# Altium PCB SixAx.PcbDoc
Units mm, origin at the board's own origin, x right, y up, seen from the top; angles counter-clockwise.
Board outline 30 x 35 mm, 4 copper layers (Component Side, GND, +3.3, Solder Side), stack 0.844 mm thick; 106 components, 61 nets, 323 pads, 139 vias.
Unrouted connection lines stored in the file: 6.
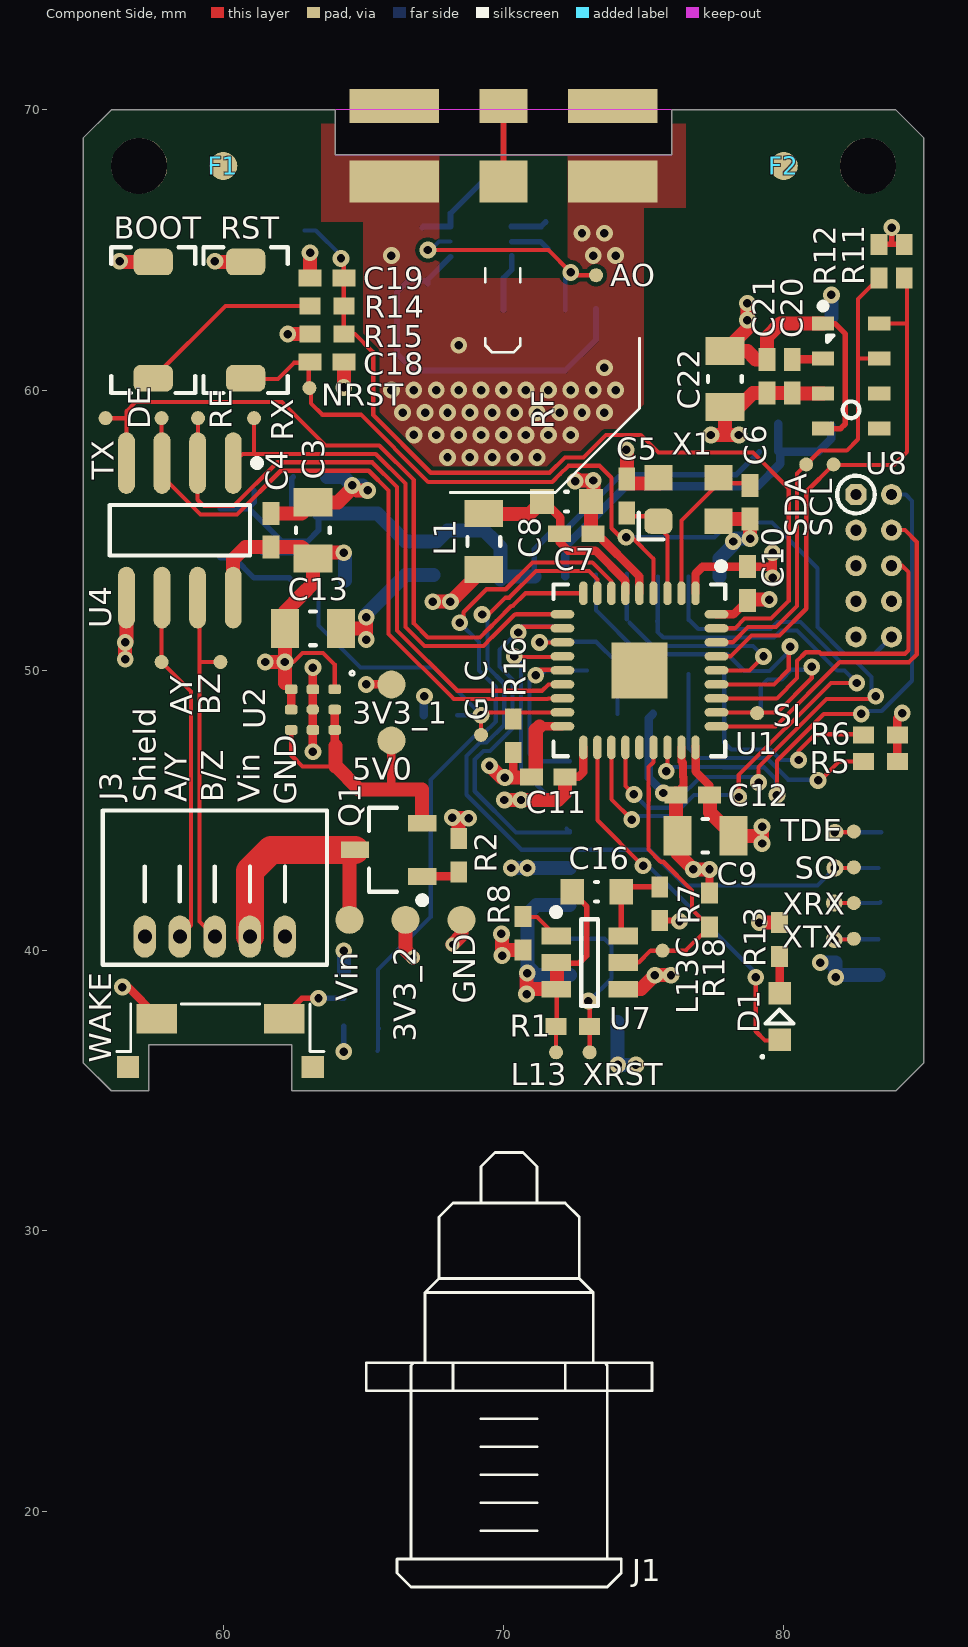
[diagram p0: Component Side view]
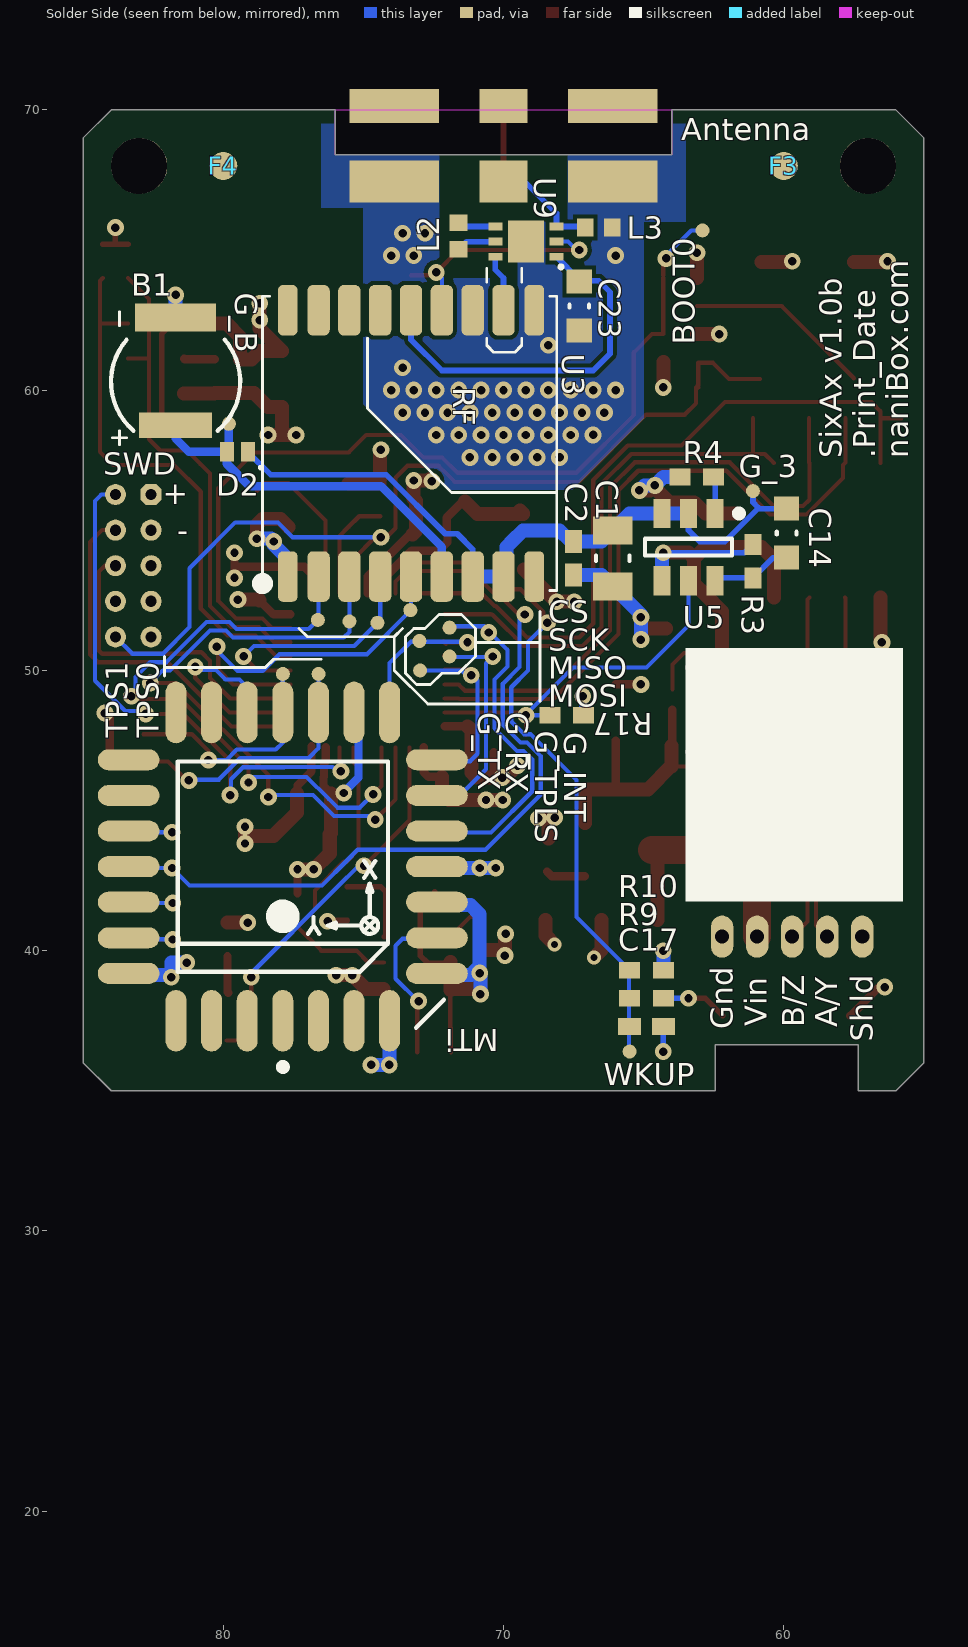
[diagram p1: Solder Side view, seen from below]
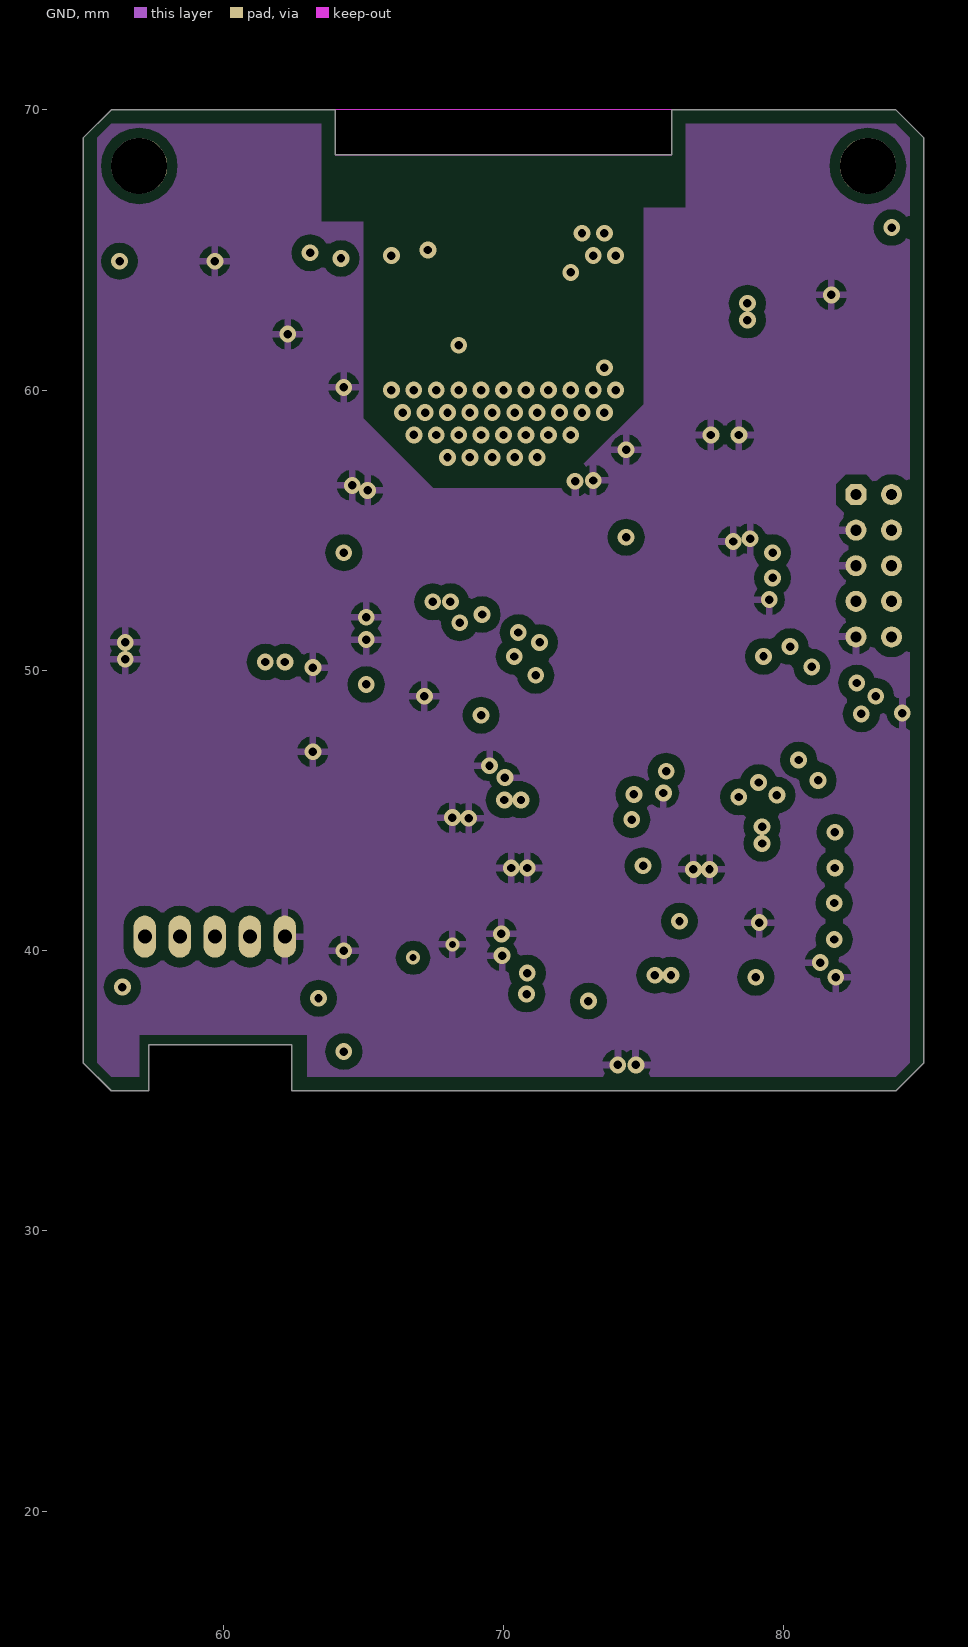
[diagram p2: GND]
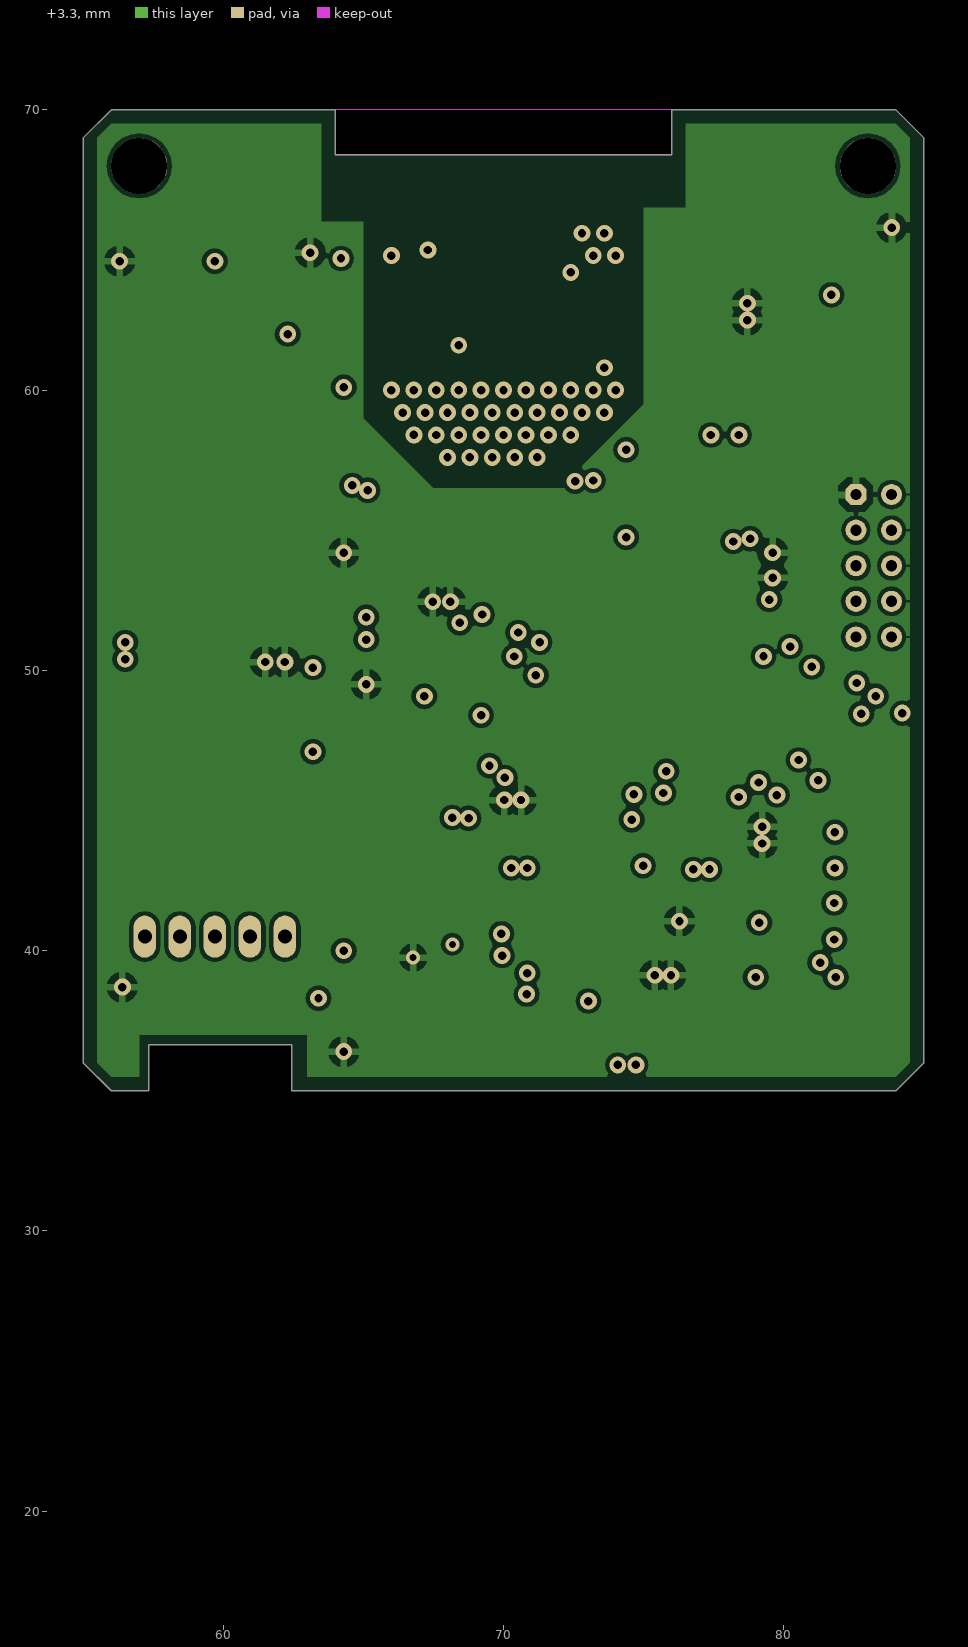
[diagram p3: +3.3]

## Layer stack, top to bottom
Top Solder: solder mask 0.0102, Solder Resist, Dk 3.5
Component Side: signal copper 0.0356
Dielectric 1: core 0.32, FR-4, Dk 4.8
GND: signal copper 0.036
Dielectric 3: prepreg 0.127, FR-4, Dk 4.2
+3.3: signal copper 0.036
Dielectric 4: core 0.254, FR-4, Dk 4.2
Solder Side: signal copper 0.0356
Bottom Solder: solder mask 0.0102, Solder Resist, Dk 3.5

## Board outline
57.35,35 56,35 55,36 55,69 56,70 64,70 64,68.4 76,68.4 76,70 84,70 85,69 85,36 84,35 62.45,35 62.45,36.65 57.35,36.65 57.35,35

## Design rules (kind name [scope] priority, off if disabled: settings)
Clearance Clearance_2 [InNamedPolygon('GND_L02_P006')] p1: gap=0.35 ignorepadtopadclearanceinfootprint=FALSE except(0: Arc-Hole Track-Hole SMDPad-Hole THPad-Hole Via-Hole Fill-Hole Poly-Hole Region-Hole Text-Hole)
Clearance Clearance_1 [InNamedPolygon('+3.3_L03_P010')] p2: gap=0.35 ignorepadtopadclearanceinfootprint=FALSE except(0: Arc-Hole Track-Hole SMDPad-Hole THPad-Hole Via-Hole Fill-Hole Poly-Hole Region-Hole Text-Hole)
Clearance [All] p3: gap=0.15 ignorepadtopadclearanceinfootprint=FALSE except(0: Arc-Hole Track-Hole SMDPad-Hole THPad-Hole Via-Hole Fill-Hole Poly-Hole Region-Hole Text-Hole)
ComponentClearance [All] p1: gap=0.127 collisioncheckmode=3 verticalgap=0.254 showdistances=FALSE
HoleSize [All] p1: absolutevalues=TRUE maxlimit=3 minlimit=0.2 maxpercent=80.000 minpercent=20.000
MinimumSolderMaskSliver [All] p1: minsoldermaskwidth=0.127
PlaneClearance [All] p1: clearance=0.5
PlaneConnect [All] p1: planeconnectstyle=Relief reliefexpansion=0.5 reliefentries=4 reliefconductorwidth=0.25 reliefairgap=0.25
PolygonConnect PolygonConnect_2 [All vs IsNamedPolygon('GND_RF_L01_P004')] p1: connectstyle=Direct reliefconductorwidth=0.254 reliefentries=4 polygonreliefangle="90 Angle" airgapwidth=0.254
PolygonConnect PolygonConnect_1 [All vs IsNamedPolygon('GND_RF_L04_P002')] p2: connectstyle=Direct reliefconductorwidth=0.254 reliefentries=4 polygonreliefangle="90 Angle" airgapwidth=0.254
PolygonConnect [All] p3: connectstyle=Relief reliefconductorwidth=0.25 reliefentries=4 polygonreliefangle="90 Angle" airgapwidth=0.25
RoutingCorners [All] p1: cornerstyle=45-Degree minsetback=2 maxsetback=2
RoutingVias [All] p1: holewidth=0.3 width=0.5 viastyle="Through Hole" minholewidth=0.2 minwidth=0.5 maxholewidth=0.5 maxwidth=0.7
SilkToSilkClearance [All] p1: silktosilkclearance=0.127
SilkToSolderMaskClearance [IsPad] p1: minsilkscreentomaskgap=0.127 clearancetoexposedcopper=TRUE
SolderMaskExpansion [All] p1: expansion=0.1
Width Width_POWERS [InNetClass('POWERS')] p1: maxlimit=1 minlimit=0.15 preferedwidth=0.5
Width [All] p2: maxlimit=0.3 minlimit=0.15 preferedwidth=0.15
22 further rules are at their usual default settings.

## Classes and differential pairs
net class POWERS: 3V3 3V3_GPS 3V3_L1 3V3A 5V0 GND VIN

## Components (designator, comment, footprint, x,y, rotation, side; value= is the part's Value field where it differs from the comment)
3V3_1 "TEST" "TEST_1.0mm, SMD"#1 66,49.5 r90 top
3V3_2 "TEST" "TEST_1.0mm, SMD"#2 65.625,41.15 r90 top
5V0 "TEST" "TEST_1.0mm, SMD"#1 66,47.5 r90 top
Antenna "MWSL1252" "MWSL1252 - Vertical - SMALLER" 70,68.4 r180 bottom
AO "TEST" "TEST_0.5mm, SMD"#1 73.3,64.1 r90 top
AY "TEST" "TEST_0.5mm, SMD"#1 57.8,50.3 r0 top
B1 "PAS409HR-VE5R" PAS409HR-VE5R 81.7,60.3 r90 bottom value=0.03F
BOOT "TL1015AF160QG" TL1015AF160QG 57.5,62.5 r270 top
BOOT0 "TEST" "TEST_0.5mm, SMD"#1 62.9,65.7 r90 bottom
BZ "TEST" "TEST_0.5mm, SMD"#1 59.9,50.3 r0 top
C1 "CL21A475KAQNNNE" "CAP 0805" 66.1,54 r90 bottom value=4.7uF
C2 "CL05B104KO5NNNC" "CAP 0402" 67.5,54 r90 bottom value=100nF
C3 "CL21A475KAQNNNE" "CAP 0805" 63.2,55 r270 top value=4.7uF
C4 "CL05B104KO5NNNC" "CAP 0402" 61.7,55 r270 top value=100nF
C5 "GRM1555C1E180JA01D" "CAP 0402" 74.4,56.225 r270 top value=18pF
C6 "GRM1555C1E180JA01D" "CAP 0402" 78.8,56 r90 top value=18pF
C7 "CL05B103KB5NNNC" "CAP 0402" 72.6,54.875 r180 top value=10nF
C8 "TMK107B7105KA-T" "CAP 0603" 72.25,56.025 r180 top value=1uF
C9 "CL21A475KAQNNNE" "CAP 0805" 77.2,44.1 r0 top value=4.7uF
C10 "CL05B104KO5NNNC" "CAP 0402" 78.7,53.1 r90 top value=100nF
C11 "CL05B104KO5NNNC" "CAP 0402" 71.6,46.2 r0 top value=100nF
C12 "CL05B104KO5NNNC" "CAP 0402" 76.75,45.55 r0 top value=100nF
C13 "CL21A475KAQNNNE" "CAP 0805" 63.2,51.5 r180 top value=4.7uF
C14 "CL10A105KA8NNNC" "CAP 0603" 59.9,54.9 r270 bottom value=1uF
C16 "CL10A105KA8NNNC" "CAP 0603" 73.325,42.1 r0 top value=1uF
C17 "CL05B103KB5NNNC" "CAP 0402" 64.9,37.3 r0 bottom value=10nF
C18 "CL05A104KA5NNNC" "CAP 0402" 63.7,61 r180 top value=100nF
C19 "CL05B103KB5NNNC" "CAP 0402" 63.7,64 r0 top value=10nF
C20 "CL05A104KA5NNNC" "CAP 0402" 80.3,60.5 r270 top value=100nF
C21 "CL05A104KA5NNNC" "CAP 0402" 79.4,60.5 r90 top value=100nF
C22 "CL21A106KAYNNNE" "CAP 0805" 77.9,60.4 r90 top value=10uF
C23 "CL10A105KA8NNNC" "CAP 0603" 67.3,63 r90 bottom value=1uF
CS "TEST" "TEST_0.5mm, SMD"#1 71.925,51.525 r180 bottom
D1 "White" "LED 0603" 79.85,37.65 r90 top
D2 "CDSQR400B" SOD-923F 79.5,57.8 r0 bottom
DE "TEST" "TEST_0.5mm, SMD"#1 57.8,59 r0 top
F1 "" Fiducial_1mm 60,68 r0 top
F2 "" Fiducial_1mm 80,68 r0 top
F3 "" Fiducial_1mm 60,68 r180 bottom
F4 "" Fiducial_1mm 80,68 r180 bottom
G_3 "TEST" "TEST_0.5mm, SMD"#1 61.1,56.4 r90 bottom
G_B "TEST" "TEST_0.5mm, SMD"#1 79.8,58.8 r90 bottom
G_C "TEST" "TEST_0.5mm, SMD"#1 69.2,47.7 r90 top
G_INT "TEST" "TEST_0.5mm, SMD"#1 73.325,52.15 r0 bottom
G_RX "TEST" "TEST_0.5mm, SMD"#1 75.5,51.75 r0 bottom
G_TPLS "TEST" "TEST_0.5mm, SMD"#1 74.5,51.7 r0 bottom
G_TX "TEST" "TEST_0.5mm, SMD"#1 76.625,51.8 r0 bottom
GND "TEST" "TEST_1.0mm, SMD"#3 68.15,41.35 r0 top
J1 "EGG.00.304.CLL" EGG.00.304.CLL 70.2,17.3 r270 top
J3 "53048-0510" "PicoBlade, 53048-0510" 59.7,40.5 r0 top
L1 "MI0805K400R-10" "IND 0805" 69.3,54.6 r90 top
L2 "LQW15AN8N2J00D" "IND 0402" 71.6,65.5 r270 bottom value=8.2nH
L3 "LQW15AN9N1J00D" "IND 0402" 66.6,65.8 r0 bottom value=9.1nH
L13 "TEST" "TEST_0.5mm, SMD"#1 71.875,36.375 r180 top
L13C "TEST" "TEST_0.5mm, SMD"#1 75.675,40 r270 top
MISO "TEST" "TEST_0.5mm, SMD"#1 71.925,50.5 r90 bottom
MOSI "TEST" "TEST_0.5mm, SMD"#1 72.975,50 r270 bottom
MTi "MTi-1" "PLCC28 - XSens MTi-1 Special" 77.875,43 r0 bottom
NRST "TEST" "TEST_0.5mm, SMD"#1 63.075,60.075 r90 top
Q1 "PMV48XP,215" SOT23-3 65.9,43.6 r180 top
R1 "P311-1.00KLRTR-ND" "RES 0402" 72.475,37.3 r180 top value="1k Ohm"
R2 "P311-1.00KLRTR-ND" "RES 0402" 68.4,43.4 r270 top value="1k Ohm"
R3 "P311-10.0KLRTR-ND" "RES 0402" 61.1,53.9 r90 bottom value="10k Ohm"
R4 "P311-1.00KLRTR-ND" "RES 0402" 63.1,56.9 r180 bottom value="1k Ohm"
R5 "P311-0.0JRTR-ND" "RES 0402" 83.45,46.75 r180 top value="0 Ohm"
R6 "P311-0.0JRTR-ND" "RES 0402" 83.45,47.7 r180 top value="0 Ohm"
R7 "P311-10.0KLRTR-ND" "RES 0402" 75.575,41.675 r270 top value="10k Ohm"
R8 "P311-1.00KLRTR-ND" "RES 0402" 70.7,40.625 r90 top value="1k Ohm"
R9 "P311-1.00KLRTR-ND" "RES 0402" 64.9,38.3 r180 bottom value="1k Ohm"
R10 "P311-100KLRTR-ND" "RES 0402" 64.9,39.3 r0 bottom value="100k Ohm"
R11 "P311-10.0KLRTR-ND" "RES 0402" 84.3,64.6 r90 top value="10k Ohm"
R12 "P311-10.0KLRTR-ND" "RES 0402" 83.4,64.6 r90 top value="10k Ohm"
R13 "P311-1.00KLRTR-ND" "RES 0402" 79.85,40.4 r90 top value="1k Ohm"
R14 "P311-1.00KLRTR-ND" "RES 0402" 63.7,63 r180 top value="1k Ohm"
R15 "P311-100KLRTR-ND" "RES 0402" 63.7,62 r0 top value="100k Ohm"
R16 "P311-100KLRTR-ND" "RES 0402" 70.35,47.675 r270 top value="100k Ohm"
R17 "P311-10.0KLRTR-ND" "RES 0402" 67.75,48.4 r0 bottom value="10k Ohm"
R18 "P311-10.0KLRTR-ND" "RES 0402" 77.35,41.45 r270 top value="10k Ohm"
RE "TEST" "TEST_0.5mm, SMD"#1 59.1,59 r0 top
RST "TL1015AF160QG" TL1015AF160QG 60.8,62.5 r270 top
RX "TEST" "TEST_0.5mm, SMD"#2 61.1,58.9 r0 top
SCK "TEST" "TEST_0.5mm, SMD"#1 73,51.05 r90 bottom
SCL "TEST" "TEST_0.5mm, SMD"#1 81.775,57.35 r0 top
SDA "TEST" "TEST_0.5mm, SMD"#1 80.8,57.35 r0 top
SI "TEST" "TEST_0.5mm, SMD"#1 79.05,48.475 r180 top
SO "TEST" "TEST_0.5mm, SMD"#1 82.5,42.975 r0 top
SWD "CORTEX_DEBUG" "H_05X02 - 1.27MM" 82.575,56.275 r270 bottom
TDE "TEST" "TEST_0.5mm, SMD"#1 82.5,44.25 r270 top
TPS0 "TEST" "TEST_0.5mm, SMD"#1 76.6,49.875 r270 bottom (schematic designator TPSEL0)
TPS1 "TEST" "TEST_0.5mm, SMD"#1 77.875,49.875 r270 bottom (schematic designator TPSEL1)
TX "TEST" "TEST_0.5mm, SMD"#2 55.8,58.9 r0 top
U1 "STM32F103TxUx" "QFN36 - 0.5MM - NO THERMAL VIAS" 74.85,50.002 r270 top
U2 "LXDC2UR30A-143" "BGA - 9 - LXDC2UR" 63.2,48.6 r0 top
U3 "uBlox MAX7" "uBlox MAX7" 73.3,58.1 r270 bottom locked
U4 "ISL83485IBZ" SOIC8 58.45,55 r270 top
U5 "TPS27081ADDCR" SOT23-6 63.4,54.4 r270 bottom
U7 "TPS27081ADDCR" SOT23-6 73.075,39.575 r0 top
U8 "MPL3115A2R1" MPL3115A2R1 82.4,60.5 r0 top
U9 "BGM1043N7" TSNP-7-10 69.2,65.3 r90 bottom
Vin "TEST" "TEST_1.0mm, SMD"#4 64.525,41.025 r0 top
WAKE "EVQ-P44B3M" "EVQ-P44B3M - NO CORNER HOLES" 59.9,35 r0 top
WKUP "TEST" "TEST_0.5mm, SMD"#1 65.5,36.4 r90 bottom
X1 "403C11A12M00000" XTAL_3.2x2.5 76.6,56.1 r0 top
XRST "TEST" "TEST_0.5mm, SMD"#1 73.075,36.375 r180 top
XRX "TEST" "TEST_0.5mm, SMD"#1 82.5,41.7 r270 top
XTX "TEST" "TEST_0.5mm, SMD"#1 82.5,40.425 r270 top

## Footprints (in the part's own frame and the unit in brackets; to place one, negate y for a bottom-side part, rotate by r counter-clockwise, add the part's x,y. Pads: shape width x height; smd on the part's side, far side on the other; paste and mask are expansions set on the pad)
"BGA - 9 - LXDC2UR" [mm] "BGA, 9-Leads, Body 2.50x2.30mmx1.20mm, Pitch 0.72mm For MuRata LXDC2UR Series"
  rrect50% 0.45x0.35 smd: 1(0.775,0.725) 2(0,0.725) 3(-0.775,0.725) 4(-0.775,0) 5(-0.775,-0.725) 6(0,-0.725) 7(0.775,-0.725) 8(0.775,0)
  oct 0.45x0.35 smd: 9(0,0)
  silkscreen extent 1.33,1.23 1.48,1.37, body extent -1.25,-1.15 1.25,1.15, height 1.2
"CAP 0402" [mm] "Chip Capacitor, 2-Leads, Body 1.00x0.50mm, IPC Medium Density"
  rect 0.82x0.6 smd: 1(-0.6,0) 2(0.6,0)
  body extent -0.5,-0.25 0.5,0.25, height 0.5
"CAP 0603" [mm] "Chip Capacitor, 2-Leads, Body 1.60x0.80mm, IPC Medium Density"
  rect 0.85x0.9 smd: 1(-0.875,0) 2(0.875,0)
  silkscreen extent -0.05,-0.35 0.05,0.35, body extent -0.8,-0.4 0.8,0.4, height 0.8
"CAP 0805" [mm] "Chip Capacitor, 2-Leads, Body 2.00x1.25mm, IPC Medium Density"
  rect 1x1.4 smd: 1(-1,0) 2(1,0)
  silkscreen extent -0.1,-0.6 0.1,0.6, body extent -1,-0.63 1,0.63, height 1.25
EGG.00.304.CLL [mm]
  silkscreen extent -15.5,-5.1 0,5.1
"EVQ-P44B3M - NO CORNER HOLES" [mm] "Switch, Tactile, 4.7x3.5mm Right Angl Force=2.4N H=3.0mm"
  rect 1.45x1.05 smd: 1(-2.275,2.575) 2(2.275,2.575)
  rect 0.8x0.8 smd: SHIELD(-3.3,0.85) SHIELD(3.3,0.85)
  silkscreen extent -3.7,1.4 3.7,3.1, body extent -3.1,-0.5 3.1,2.5, height 1.36
Fiducial_1mm [mm]
  round 1 smd paste+0 mask+0.25: 1(0,0)
"H_05X02 - 1.27MM" [mm]
  oct 0.75x0.75 hole 0.4: 1(0,0)
  round 0.75 hole 0.4: 2(0,-1.27) 3(1.27,0) 4(1.27,-1.27) 5(2.54,0) 6(2.54,-1.27) 7(3.81,0) 8(3.81,-1.27) 9(5.08,0) 10(5.08,-1.27)
"IND 0402" [mm] "Chip Inductor, 2-Leads, Body 1.00x0.50mm, IPC Medium Density"
  rect 0.59x0.64 smd: 1(-0.48,0) 2(0.48,0)
  body extent -0.5,-0.25 0.5,0.25, height 0.5
"IND 0805" [mm] "Chip Inductor, 2-Leads, Body 2.00x1.25mm, IPC Medium Density"
  rect 0.97x1.37 smd: 1(-0.995,0) 2(0.995,0)
  silkscreen extent -0.15,-0.59 0.15,0.59, body extent -1,-0.63 1,0.63, height 0.9
"LED 0603" [mm] "Chip LED, 2-Leads, Body 1.60x0.80mm, IPC Medium Density"
  rect 0.8x0.8 smd: A(-0.825,0) K(0.825,0)
  silkscreen extent -1.49,-0.5 0.25,0.66, body extent -0.8,-0.4 0.8,0.4, height 0.75
MPL3115A2R1 [mm] "Barometric Pressure Sensor, SMD"
  rect 0.8x0.5 smd: 1(-1,1.875) 2(-1,0.625) 3(-1,-0.625) 4(-1,-1.875) 5(1,-1.875) 6(1,-0.625) 7(1,0.625) 8(1,1.875)
  silkscreen extent -1.1,-1.5 0.3,2.6, body extent -1.5,-2.5 1.5,2.5, height 1.1
"MWSL1252 - Vertical - SMALLER" [mm] "GPS Antenna, Passive, SMD"
  rect 3.2x1.5 smd far side: GND(-3.9,-0.95) GND(3.9,-0.95)
  rect 3.2x1.5 smd: GND(-3.9,-0.95) GND(3.9,-0.95)
  rect 3.2x1.2 smd far side: GND(-3.9,1.74) GND(3.9,1.74)
  rect 3.2x1.2 smd: GND(-3.9,1.74) GND(3.9,1.74)
  rect 1.7x1.5 smd far side: SIG(0,-0.95)
  rect 1.7x1.5 smd: SIG(0,-0.95)
  rect 1.7x1.2 smd far side: SIG(0,1.74)
  rect 1.7x1.2 smd: SIG(0,1.74)
  body extent -6.65,-6.24 6.65,7.06, height 22.61
PAS409HR-VE5R [mm] "Supercap, 3.3V, 0.03F"
  rect 0.9x2.6 smd: +(-1.55,0)
  rect 1x2.9 smd: -(2.3,0)
  silkscreen extent -2.25,-2.3 2.5,2.3, body extent -2.4,-2.4 2.4,2.4, height 1.55
"PicoBlade, 53048-0510" [mm] "PicoBlade, Header, R/A, PTH, 5 Pos, 1.25mm Pitch"
  oval 0.8x1.5 hole 0.5: 1(2.5,0) 2(1.25,0) 3(0,0) 4(-1.25,0) 5(-2.5,0)
  silkscreen extent -4,-1 4,4.5, body extent -4,-1.05 4,4.45, height 3.51
"PLCC28 - XSens MTi-1 Special" [mm] "Leaded Chip Carrier, 28-Leads, Body 12.45x12.45mm, Pitch 1.270mm, IPC Medium Density"
  oval 0.75x2.2 smd: 1(0,5.5) 2(-1.27,5.5) 3(-2.54,5.5) 4(-3.81,5.5) 12(-3.81,-5.5) 13(-2.54,-5.5) 14(-1.27,-5.5) 15(0,-5.5) 16(1.27,-5.5) 17(2.54,-5.5) 18(3.81,-5.5) 26(3.81,5.5) 27(2.54,5.5) 28(1.27,5.5)
  oval 2.2x0.75 smd: 5(-5.5,3.81) 6(-5.5,2.54) 7(-5.5,1.27) 8(-5.5,0) 9(-5.5,-1.27) 10(-5.5,-2.54) 11(-5.5,-3.81) 19(5.5,-3.81) 20(5.5,-2.54) 21(5.5,-1.27) 22(5.5,0) 23(5.5,1.27) 24(5.5,2.54) 25(5.5,3.81)
  silkscreen extent -5.75,-3.75 3.75,7.27, body extent -6.05,-5.95 6.05,5.95, height 2.6
"QFN36 - 0.5MM - NO THERMAL VIAS" [mm] "QFN, 36-Leads, Body 6.00x6.00mm, Pitch 0.50mm, IPC Medium Density"
  oval 0.85x0.3 smd: 1(-2.75,2) 2(-2.75,1.5) 3(-2.75,1) 4(-2.75,0.5) 5(-2.75,0) 6(-2.75,-0.5) 7(-2.75,-1) 8(-2.75,-1.5) 9(-2.75,-2) 19(2.75,-2) 20(2.75,-1.5) 21(2.75,-1) 22(2.75,-0.5) 23(2.75,0) 24(2.75,0.5) 25(2.75,1) 26(2.75,1.5) 27(2.75,2)
  oval 0.3x0.85 smd: 10(-2,-2.75) 11(-1.5,-2.75) 12(-1,-2.75) 13(-0.5,-2.75) 14(0,-2.75) 15(0.5,-2.75) 16(1,-2.75) 17(1.5,-2.75) 18(2,-2.75) 28(2,2.75) 29(1.5,2.75) 30(1,2.75) 31(0.5,2.75) 32(0,2.75) 33(-0.5,2.75) 34(-1,2.75) 35(-1.5,2.75) 36(-2,2.75)
  rect 2x2 smd paste-1: 37(0,0)
  rrect50% 0.7x0.7 on Top Paste: ThermalPaste(-0.5,0.5) ThermalPaste(-0.5,-0.5) ThermalPaste(0.5,0.5) ThermalPaste(0.5,-0.5)
  silkscreen extent -3.84,-3.07 3.07,3.07, body extent -3.07,-3.07 3.07,3.07, height 1
"RES 0402" [mm] "Chip Resistor, 2-Leads, Body 1.00x0.50mm, IPC Medium Density"
  rect 0.75x0.6 smd: 1(-0.6,0) 2(0.6,0)
  body extent -0.5,-0.25 0.5,0.25, height 0.35
SOD-923F [mm] "SOD-923F / 0402, Chip Diode, 2-Leads, Body 1.00x0.60mm, IPC Medium Density"
  rect 0.5x0.7 smd: 1(-0.375,0) 2(0.375,0)
  silkscreen extent -0.89,0.51 -0.79,0.61, body extent -0.53,-0.33 0.53,0.32, height 0.55
SOIC8 [mm] "SOIC, 8-Leads, Body 4.90x3.90mm, Pitch 1.27mm, IPC Medium Density"
  oval 2.2x0.6 smd: 1(-2.4,1.905) 2(-2.4,0.635) 3(-2.4,-0.635) 4(-2.4,-1.905) 5(2.4,-1.905) 6(2.4,-0.635) 7(2.4,0.635) 8(2.4,1.905)
  silkscreen extent -2.52,-2.5 0.9,2.88, body extent -2,-2.5 2,2.5, height 1.76
SOT23-3 [mm] "SOT23, 3-Leads, Body 2.90x2.45mm, Pitch 0.95mm, IPC Medium Density"
  rect 1x0.6 smd: 1(-1.2,0.95) 2(-1.2,-0.95) 3(1.2,0)
  silkscreen extent -1.33,-1.5 0.7,1.92, body extent -0.7,-1.5 0.7,1.5, height 1.1
SOT23-6 [mm] "SOT23, 6-Leads, Body 2.90x2.80mm, Pitch 0.95mm, IPC Medium Density"
  rect 1.05x0.6 smd: 1(-1.2,0.95) 2(-1.2,0) 3(-1.2,-0.95) 4(1.2,-0.95) 5(1.2,0) 6(1.2,0.95)
  silkscreen extent -1.32,-1.55 0.3,1.92, body extent -0.87,-1.52 0.87,1.53, height 1.1
"TEST_0.5mm, SMD"#1 [mm]
  round 0.5 smd: 0(0,0)
"TEST_0.5mm, SMD"#2 [mm]
  round 0.5 smd: 0(0,0.1)
"TEST_1.0mm, SMD"#1 [mm]
  round 1 smd: 0(0,0)
"TEST_1.0mm, SMD"#2 [mm]
  round 1 smd: 0(-0.05,-0.875)
"TEST_1.0mm, SMD"#3 [mm]
  round 1 smd: 0(0.35,-0.25)
"TEST_1.0mm, SMD"#4 [mm]
  round 1 smd: 0(-0.025,0.075)
TL1015AF160QG [mm] "Switch, Tactile, 4x3mm"
  rrect50% 0.95x1.4 smd: 1(-2.075,0) 2(2.075,0)
  silkscreen extent -2.6,-1.5 2.6,1.5, body extent -1.95,-1.45 1.95,1.45, height 2
TSNP-7-10 [mm]
  rect 0.28x0.5 smd paste-0.14: 1(-0.54,-1.09) 2(0,-1.09) 3(0.54,-1.09) 4(0.54,1.08) 5(0,1.08) 6(-0.54,1.09)
  rect 1.5x1.28 smd paste-0.64: 7(0,0)
  oval 0.28x0.5 on Bottom Paste: PASTE(-0.57,-0.3) PASTE(-0.57,0.3) PASTE(-0.54,-1.1) PASTE(-0.54,1.1) PASTE(-0.19,-0.3) PASTE(-0.19,0.3) PASTE(0,-1.1) PASTE(0,1.1) PASTE(0.19,-0.3) PASTE(0.19,0.3) PASTE(0.54,-1.1) PASTE(0.54,1.1) PASTE(0.57,-0.3) PASTE(0.57,0.3)
  silkscreen extent -0.95,-1.3 -0.85,-1.2, body extent -0.85,-1 0.85,0.97, height 0.73
"uBlox MAX7" [mm]
  rrect50% 1.8x0.7 smd: 1(4.75,-4.4) 9(4.75,4.4) 10(-4.75,4.4) 18(-4.75,-4.4)
  rrect50% 1.8x0.8 smd: 2(4.75,-3.3) 3(4.75,-2.2) 4(4.75,-1.1) 5(4.75,0) 6(4.75,1.1) 7(4.75,2.2) 8(4.75,3.3) 11(-4.75,3.3) 12(-4.75,2.2) 13(-4.75,1.1) 14(-4.75,0) 15(-4.75,-1.1) 16(-4.75,-2.2) 17(-4.75,-3.3)
  silkscreen extent -6.25,-5.43 5.25,5.2, body extent -5.03,-4.99 4.67,5.11, height 2.47
XTAL_3.2x2.5 [mm]
  rrect50% 1x0.9 smd: 1(-1.075,-0.775)
  rect 1x0.9 smd: 2(1.075,-0.775) 3(1.075,0.775) 4(-1.075,0.775)
  silkscreen extent -1.78,-1.43 -0.9,-0.48, body extent -1.6,-1.25 1.6,1.25, height 0.8

## Part data
Antenna: "GPS Antenna, Passive, SMD", Manufacturer=Maruwa, ComponentLink1Description=Datasheet, ComponentLink1URL=http://www.maruwa-g.com/e/products/electronic-parts/multifilar_antennas-gps_antennas.html, ManufacturerPartNumber=MWSL1252, Pins=1, Series="GPS Antenna"
B1: "Super Cap, 3.3V, 0.03F", Manufacturer="Taiyo Yuden", Voltage=3.3V, ComponentLink1Description=Datasheet, ComponentLink1URL=http://media.digikey.com/pdf/Data%20Sheets/Taiyo%20Yuden%20PDFs%20URL%20links/PAS%20Coin%20Type%20Capacitor.pdf, Manufacturer Part Number=PAS409HR-VE5R
BOOT RST: "Switch, Tactile, SMD", Manufacturer=E-Switch, ComponentLink1Description=Datasheet, ComponentLink1URL=http://www.mouser.com/ds/2/140/TL1015-346206.pdf, Manufacturer Part Number=TL1015AF160QG
C1 C3 C9 C13: "MLCC, 4.7uF, 0805, 10%, 25V, X5R", Manufacturer=Samsung, Temp Coefficient=X5R, Temp Range=-55-125°C, Tolerance=10%, Voltage Rating=25V, ComponentLink1Description=Datasheet, ComponentLink1URL=http://www.samsungsem.com/servlet/ProductSearchView?page=1&searchIdx=1&lang=kr&partnum=1&find_val=CL21A475KAQNNNE, Manufacturer Part Number=CL21A475KAQNNNE
C2 C4 C10 C11 C12: "MLCC, 100nF, 0402, 10%, 16V, X7R", Manufacturer=Samsung, Temp Coefficient=X7R, Temp Range=-55-125°C, Tolerance=10%, Voltage Rating=16V, ComponentLink1Description=Datasheet, ComponentLink1URL=http://www.samsungsem.com/servlet/ProductSearchView?page=1&searchIdx=1&lang=kr&partnum=1&find_val=CL05B104KO5NNNC, Manufacturer Part Number=CL05B104KO5NNNC
C5 C6: "MLCC, 18pF, 0402, 5%, 25V, C0G", Manufacturer=muRata, Temp Coefficient=C0G, Temp Range=-55-125°C, Tolerance=5%, Voltage Rating=25V, ComponentLink1Description=Datasheet, ComponentLink1URL=http://www.murata.com/products/catalog/pdf/c02e.pdf, Manufacturer Part Number=GRM1555C1E180JA01D
C7 C17 C19: "MLCC, 10nF, 0402, 10%, 50V, X7R", Manufacturer=Samsung, Temp Coefficient=X7R, Temp Range=-55-125°C, Tolerance=5%, Voltage Rating=50V, ComponentLink1Description=Datasheet, ComponentLink1URL=http://www.samsungsem.com/servlet/ProductSearchView?page=1&searchIdx=1&lang=kr&partnum=1&find_val=CL05B103KB5NNNC, Manufacturer Part Number=CL05B103KB5NNNC
C8: "MLCC, 1uF, 0603, 10%, 25V", Manufacturer="Taiyo Yuden", Temp Coefficient=X7R, Temp Range=-55-125°C, Tolerance=10%, Voltage Rating=25V, ComponentLink1Description=Datasheet, ComponentLink1URL=http://www.yuden.co.jp/or/product/category/capacitor/TMK107B7105KA-T.pdf, Manufacturer Part Number=TMK107B7105KA-T
C14 C16 C23: "MLCC, 1uF, 0603, 10%, 25V, X5R", Manufacturer=Samsung, Temp Coefficient=X5R, Temp Range=-55-125°C, Tolerance=10%, Voltage Rating=25V, ComponentLink1Description=Datasheet, ComponentLink1URL=http://www.samsungsem.com/servlet/ProductSearchView?page=1&searchIdx=1&lang=kr&partnum=1&find_val=CL10A105KA8NNNC, Manufacturer Part Number=CL10A105KA8NNNC
C18 C20 C21: "MLCC, 100nF, 0402, 10%, 25V, X5R", Manufacturer=Samsung, Temp Coefficient=X5R, Temp Range=-55-125°C, Tolerance=10%, Voltage Rating=25V, ComponentLink1Description=Datasheet, ComponentLink1URL=http://www.samsungsem.com/servlet/ProductSearchView?page=1&searchIdx=1&lang=kr&partnum=1&find_val=CL05A104KA5NNNC, Manufacturer Part Number=CL05A104KA5NNNC
C22: "MLCC, 10uF, 0805, 10%, 25V, X5R", Manufacturer=Samsung, Temp Coefficient=X5R, Temp Range=-55-125°C, Tolerance=10%, Voltage Rating=25V, ComponentLink1Description=Datasheet, ComponentLink1URL=http://www.samsungsem.com/servlet/ProductSearchView?page=1&searchIdx=1&lang=kr&partnum=1&find_val=CL21A106KAYNNNE, Manufacturer Part Number=CL21A106KAYNNNE
D1: library part 1608SWD-04, "LED, White, 0603", Colour=White, ComponentLink1Description=Datasheet, Manufacturer Part Number=1608SWD-04
D2: "DIODE, Switching, Low Leakage, 90V, 100mA", Manufacturer="Comchip Technology", ComponentLink1Description=Datasheet, ComponentLink1URL=http://www.mouser.com/ds/2/80/CDSQR400B-RevB370402-476902.pdf, Manufacturer Part Number=CDSQR400B, Reverse Leakage=100nA, Vf="1.0V @ 100mA"
F1 F2 F3 F4: library part "Fiducial 1mm", ComponentLink1Description=Datasheet
J1: "LEMO 00, 4-pin", ComponentLink1Description=Datasheet, ComponentLink1URL=http://, Manufacturer Part Number=EGG.00.304.CLL
J3: "PicoBlade, Header, R/A, PTH, 5 Pos, 1.25mm Pitch", Manufacturer=Molex, ComponentLink1Description=Datasheet, ComponentLink1URL=http://www.molex.com/molex/products/datasheet.jsp?part=active/0530480510_PCB_HEADERS.xml, ManufacturerPartNumber=53048-0510, Pins=5, Pitch=1.25mm, Rows=1, Series=PicoBlade
L1: "IND, EMI, 40Ohm, 100MHz, 1.5A, 0805", Manufacturer=Laird, ComponentLink1Description=Datasheet, ComponentLink1URL=http://www.mouser.com/ds/2/223/MI0805K400R-10-587425.pdf, Core=Ferrite, DCR="50 mOhm max", Impedence="40 Ohms", Manufacturer Part Number=MI0805K400R-10, Type="Ferrite Chip Bead"
L2: "IND, 8.2nH, 5%, 100MHz", Manufacturer="Murata Electronics", ComponentLink1Description=Datasheet, ComponentLink1URL=http://www.mouser.com/ds/2/281/o05e-522697.pdf, Manufacturer Part Number=LQW15AN8N2J00D
L3: "IND, 9.1nH, 5%, 100MHz", Manufacturer="Murata Electronics", ComponentLink1Description=Datasheet, ComponentLink1URL=http://www.mouser.com/ds/2/281/o05e-522697.pdf, Manufacturer Part Number=LQW15AN9N1J00D
MTi: "XSens MTi-1 Series", Manufacturer=XSens, ComponentLink1Description=Datasheet, ComponentLink1URL=https://www.xsens.com/products/mti-1-series/?page_id=functions/mti-1/, Manufacturer Part Number=MTi-1
Q1: "MOSFET P-CH -20 V -3.5 A, SOT23-3", Manufacturer=NXP, ComponentLink1Description=Datasheet, ComponentLink1URL=http://www.mouser.com/ds/2/302/PMV48XP-352572.pdf, Id=-3.5A, Manufacturer Part Number=PMV48XP,215, Rds="55m Ohms", Vds=-20V
R1 R2 R4 R8 R9 R13 R14: "RES, 0402, 1k, 1%", Manufacturer=Yageo, Power=63mW, Tolerance=1%, ComponentLink1Description=Datasheet, ComponentLink1URL=http://www.yageo.com/NewPortal/_en/search/productDocs.jsp?YageoPartNumber=P311-1.00KLRTR-ND, Manufacturer Part Number=P311-1.00KLRTR-ND
R3 R7 R11 R12 R17 R18: "RES, 0402, 10k, 1%", Manufacturer=Yageo, Power=63mW, Tolerance=1%, ComponentLink1Description=Datasheet, ComponentLink1URL=http://www.yageo.com/NewPortal/_en/search/productDocs.jsp?YageoPartNumber=P311-10.0KLRTR-ND, Manufacturer Part Number=P311-10.0KLRTR-ND
R5 R6: "RES, 0402, 0, 5%", Manufacturer=Yageo, Power=63mW, Tolerance=5%, ComponentLink1Description=Datasheet, ComponentLink1URL=http://www.yageo.com/NewPortal/_en/search/productDocs.jsp?YageoPartNumber=RC0402JR-070RL, Manufacturer Part Number=P311-0.0JRTR-ND
R10 R15 R16: "RES, 0402, 100k, 1%", Manufacturer=Yageo, Power=63mW, Tolerance=1%, ComponentLink1Description=Datasheet, ComponentLink1URL=http://www.yageo.com/NewPortal/_en/search/productDocs.jsp?YageoPartNumber=P311-100KLRTR-ND, Manufacturer Part Number=P311-100KLRTR-ND
SWD: "Cortex Debug", ComponentLink1Description=Datasheet, ComponentLink1URL=http://, Manufacturer Part Number="Cortex Debug"
U1: "MCU, ARM-based 32-bit MCU with 64  or 128 KB Flash, USB, CAN, 7 timers, 2 ADCs, 9 com. interfaces", Part Number Eg=STM32F103TBU, ComponentLink1Description=Datasheet, ComponentLink1URL=http://www.st.com/st-web-ui/static/active/en/resource/technical/document/datasheet/CD00161566.pdf, ComponentLink2Description=http://www.st.com/web/catalog/mmc/FM141/SC1169/SS1031/LN1565/PF189782, Cortex=M3, Pins=36
U2: "DC-DC 3.0Vout 600mA 2.5x2.3mm uDCDC", ComponentLink1Description=Datasheet, ComponentLink1URL=http://www.mouser.com/ds/2/281/2UR_E-211770.pdf, Manufacturer Part Number=LXDC2UR30A-143
U3: "GPS, u-blox 7 GPS/GNSS module", ComponentLink1Description=Datasheet, ComponentLink1URL=http://www.u-blox.com/en/gps-modules/pvt-modules/max-7.html, Manufacturer Part Number="uBlox MAX7"
U4: "RS-422/RS-485, 3.3V, HalfDuplex, TRN 1TX/1RX, W/SHTDN", Manufacturer=Intersil, ComponentLink1Description=Datasheet, ComponentLink1URL=http://www.mouser.com/ds/2/465/isl83483-85-88-90-91-554566.pdf, Manufacturer Part Number=ISL83485IBZ
U5 U7: "High Side Load Switch PFET 1.2V-8V 3A", Manufacturer=TI, Manufacturer Part Number - Simple=TPS27081A, ComponentLink1Description=Datasheet, ComponentLink1URL=http://www.ti.com/product/tps27081a, Manufacturer Part Number=TPS27081ADDCR
U8: "Barometric Pressure Sensor, SMD", Manufacturer=Freescale, ComponentLink1Description=Datasheet, ComponentLink1URL=http://www.mouser.com/ds/2/161/MPL3115A2-256325.pdf, Manufacturer Part Number=MPL3115A2R1
U9: "RF, LNA, GPS", Manufacturer=Infineon, ComponentLink1Description=Datasheet, ComponentLink1URL=http://www.mouser.com/ds/2/196/Infineon-BGM1043N7-DS-v03_00-en-537606.pdf, Manufacturer Part Number=BGM1043N7
WAKE: "Switch, Tactile, Right Angle, Mid-Plane Mount,, SMD", Manufacturer=E-Switch, ComponentLink1Description=Datasheet, ComponentLink1URL=http://www.mouser.com/ds/2/315/ATV0000CE6-64395.pdf, Manufacturer Part Number=EVQ-P44B3M
X1: "Crystal 12MHz 10pF 10ppm 3.2x2.5mm", Capacitor Calculation="C = 2x (CL - CS) ; CL = Load (10pF) ; CS = Stray. eg: 2-5pF", Frequency=12MHz, Manufacturer="CTS Electronic Components", ComponentLink1Description=Datasheet, ComponentLink1URL=http://www.mouser.com/ds/2/96/008-0288-0_F-16202.pdf, Loading=10pF, Manufacturer Part Number=403C11A12M00000, Stability=10ppm
3V3_1 3V3_2 5V0 AO AY BOOT0 BZ CS DE G_3 G_B G_C G_INT G_RX G_TPLS G_TX GND L13 L13C MISO MOSI NRST RE RX SCK SCL SDA SI SO TDE TPS0 TPS1 TX Vin WKUP XRST XRX XTX: ComponentLink1Description=Datasheet

## Free pads (board coordinates)
  round 2 hole 2 unplated: HOLE(57,68) HOLE(83,68)

## Via types
v1: diameter 0.6, hole 0.3, Component Side to Solder Side, tented both sides, 137 vias
v2: diameter 0.5, hole 0.25, Component Side to Solder Side, tented both sides, 2 vias

## Nets (pads, with @x,y where several pads share a name; then routed paths per layer and width w, separated by ;. In a path a pad name is that pad's centre, name@x,y a point inside that pad or via, vN(x,y) a via of type N, cw(c..) or ccw(c..) an arc to the next point about the centre after c; other vN are vias at no path point)
3V3: 3V3_1.0 3V3_2.0 BOOT.1 C3.2 C4.2 C9.2 C10.2 C11.2 C12.2 C13.2 C17.1 C19.1 C21.2 C22.2 L1.1 R3.2 R7.2 R11.2 R12.2 SWD.1 U1.1 U1.19 U1.27 U2.1 U2.3 U2.4 U4.8 U5.4 U7.4 U8.1 U8.4 WAKE.1 | length 59.2
  Component Side w0.15: v1(62.2,50.3) 62.5,50.3 62.825,50.625 63.557,50.625 63.975,50.207 U2.1
  Component Side w0.2: R7.2 76.302,41.075 v1(76.279,41.052) ; U8.4 82.025,58.625 82.2,58.8 82.2,62 81.825,62.375 U8.1 ; R12.2 83.85,65.2 ; v1(83.85,65.8) 83.85,65.2 ; R11.2 83.85,65.2
  Component Side w0.3: v1@56.525,38.675 56.425,38.675 v1(56.4,38.7) 56.6,38.7 WAKE.1@57.625,37.675 ; 62.2,49.55 U2.3 U2.4 ; v1(65.1,49.5) 3V3_1.0 ; C11.2 72.675,46.2 72.85,46.375 U1.19 ; U1.27@76.85,47.3 76.85,46.841 76.854,46.837 76.854,46.396 77.35,45.9 C12.2 ; U1.1@76.85,52.752 76.85,53.45 77.1,53.7 C10.2 ; C10.2 79.5,53.7 v1@79.6,53.6 ; v1(79.6,53.3) v1@79.6,53.6 ; v1(79.6,54.2) v1@79.6,53.6
  Component Side w0.5: v1(56.3,64.6) 56.325,64.575 BOOT.1 ; U4.8 60.355,53.955 60.8,54.4 62.8,54.4 C3.2 ; v1(61.5,50.3) v1(62.2,50.3) ; 62.2,49.55 v1(62.2,50.3) ; C19.1 v1(63.1,64.9) ; v1(64.3,54.2) 63.4,54.2 C3.2 ; 3V3_2.0 66.5,40.025 v2(66.775,39.75) ; v1(67.475,52.45) 67.478,52.453 v1(68.103,52.453) 68.128,52.453 L1.1@69.275,53.6 ; v1@70.059,45.375 v1(70.625,45.375) 71.95,45.375 72.2,45.625 C11.2 ; U7.4 74.9,38.625 v1(75.4,39.125) v1(75.975,39.125) ; C12.2@77.375,45.6 77.375,44.925 C9.2 79.125,44.1 v1@79.15,44.075 ; v1(78.7,63.1) v1(78.7,62.5) 78.7,62.2 C22.2 78.7,61.4 79,61.1 C21.2 79.4,61.9 79.875,62.375 U8.1 ; v1@79.225,43.8 v1(79.225,43.825) v1(79.225,44.425) ; v1(62.2,50.3) C13.2 62.2,52.1 62.8,52.7 63.2,53.1 C3.2
  Solder Side w0.2: R3.2 61.4,54.2 v1(64.3,54.2) ; v1(64.3,36.4) C17.1
  Solder Side w0.5: v1(64.3,54.2) 64.35,54.15 U5.4
  other v1: 70.03,45.375
3V3_GPS: C1.2 C2.2 C14.1 D2.1 G_3.0 U3.7 U3.8 U5.2 U5.3 | length 25.8
  Solder Side w0.2: C14.1 60.925,55.775 62.1,54.6 63,54.6 63.4,55 U5.2 U5.2@63.4,55.796 ; 60.9,55.8 61.1,56 G_3.0 ; U3.7 71.1,54.325 71.65,54.875 72.079,54.875 74.179,56.975 78.3,56.975 D2.1
  Solder Side w0.5: U5.2 65.5,55.6 66.5,54.6 67.6,54.6 68,55 69.3,55 69.673,54.627 69.9,54.4 69.9,53.25 U3.8 U3.7
3V3_GPS_VBKP: B1.+ D2.2 G_B.0 U3.6 | length 13.9
  Solder Side w0.3: U3.6 72.2,54.4 74.375,56.575 79.075,56.575 79.875,57.375 D2.2 81.225,57.8 81.7,58.275 B1.+ ; G_B.0 79.8,57.825 D2.2@79.825,57.8
3V3_L1: C16.1 L13.0 MTi.5 MTi.7 R1.2 U7.2 U7.3 | length 14.8
  Component Side w0.15: L13.0 71.875,37.25 71.9,37.275 U7.3@71.9,38.6
  Component Side w0.2: U7.2@71.975,39.55 72.7,39.55 72.975,39.825 72.975,41.575 C16.1
  Component Side w0.5: v1(70.85,39.2) 70.825,39.175 v1(70.825,38.45) 70.825,38.6 70.85,38.625 U7.3 ; U7.3@71.9,38.6 U7.2@71.9,39.6
  Solder Side w0.5: v1(70.825,38.45) 70.825,39.175 v1(70.85,39.2) v1@70.85,39.275 ; MTi.7@72.35,41.625 71.175,41.625 70.85,41.3 70.85,39.45 70.975,39.325 71.16,39.14 MTi.5@72.375,39.14
3V3A: C7.2 C8.2 L1.2 U1.6 | length 7.6
  Component Side w0.3: C8.2@71.4,56.075 72.025,55.45 C7.2@72.025,54.85 ; C7.2 72,54.575 72.3,54.275 73.275,54.275 74.35,53.2 U1.6
  Component Side w0.5: L1.2@69.3,55.575 70.925,55.575 C8.2 ; L1.2 L1.2@69.405,55.7
5V0: 5V0.0 Q1.2 U2.5 U2.7 U2.8 | length 11.1
  Component Side w0.15: U2.5 62.425,46.975 62.825,46.575 64,46.575
  Component Side w0.3: U2.7 63.975,47.325 64,47.3 ; U2.7@63.975,47.925 U2.8 ; 66,45.7 66,45.75 5V0.0
  Component Side w0.5: 64,46.575 64,47.3 ; 64,46.6 64.85,45.75 66,45.75 67.1,45.75 Q1.2
\USART1_RE: RE.0 U1.15 U4.2 | length 23.1
  Component Side w0.15: U4.2 59.085,56.09 59.313,55.862 60.363,55.862 61.926,57.425 65.317,57.425 66.2,56.542 66.2,51.426 68.351,49.275 71.373,49.275 71.6,49.502 U1.15 ; U4.2@59.1,57.415 RE.0
ANT_ON: AO.0 U3.13 U9.2 | length 8.7
  Component Side w0.15: v1(67.3,65) 71.6,65 v1(72.4,64.2) 72.5,64.1 AO.0
  Solder Side w0.15: v1(67.3,65) 67.4,65 67.7,65.3 U9.2@68.1,65.3 ; U3.13 72.2,64 v1(72.4,64.2)
BOOT0: BOOT0.0 C19.2 R14.1 R15.2 U1.35 | length 32
  Component Side w0.15: v1(64.2,64.7) 64.3,64.6 C19.2@64.3,64.1 ; C19.2 R15.2 64.7,62 65.35,61.35 65.35,59.109 67.405,57.054 71.644,57.054 72.19,57.6 72.859,57.6 73.659,58.4 74.9,58.4 75.525,57.775 78.9,57.775 80.175,56.5 80.175,52.481 79.544,51.85 78.601,51.85 78.253,51.502 U1.35
  Solder Side w0.15: BOOT0.0 63.3,65.7 64.2,64.8 v1(64.2,64.7)
"DATA A/Y": AY.0 J3.4 U4.6 | length 12.7
  Component Side w0.15: U4.6 57.8,52.585 AY.0 58.854,49.246 58.854,40.904 J3.4
"DATA B/Z": BZ.0 J3.3 U4.7 | length 13.1
  Component Side w0.15: U4.7 59.154,52.531 59.154,41.046 J3.3 ; 59.175,50.275 59.2,50.3 BZ.0
"DE/CTS (DNC)": MTi.21 TDE.0 | length 2.3
  Component Side w0.15: v1(81.825,44.225) 82.475,44.225 TDE.0
  Solder Side w0.15: v1(81.825,44.225) MTi.21@83.475,44.225
GND: B1.- C1.1 C2.1 C3.1 C4.1 C5.1 C6.1 C7.1 C8.1 C9.1 C10.1 C11.1 C12.1 C13.1 C18.1 C20.2 C21.1 C22.1 GND.0 J3.1 MTi.4 MTi.8 MTi.13 MTi.25 R2.1 R4.1 R5.1 R6.1 R8.1 R10.1 R13.2 R15.1 R16.2 R17.1 R18.1 RST.1 SWD.3 SWD.5 SWD.9 U1.5 U1.18 U1.26 U1.36 U2.2 U2.6 U2.9 U3.1 U4.5 U8.3 X1.2 X1.4 | length 69.9
  Component Side w0.15: v1@64.6,56.5 v1(64.6,56.6)
  Component Side w0.3: v1(63.2,47.1) v1(63.2,50.1) ; 70.35,46.25 R16.2 ; 71.277,48.002 U1.18 ; v1(72.554,56.753) 72.625,56.825 v1@72.675,56.775 ; C7.1 73.225,54.875 73.325,54.875 74.85,53.35 U1.5 ; C7.1@73.211,54.811 C7.1@73.225,54.825 ; C12.1@76.15,45.6 76.423,45.873 76.423,46.191 76.404,46.21 76.404,46.651 76.4,46.654 76.4,46.7 76.35,46.75 U1.26 ; R18.1 v1(77.35,42.9) ; U1.36 78.202,52.002 C10.1 ; R5.1 R6.1 84.05,48.3 v1(84.225,48.475)
  Component Side w0.5: v1(56.5,50.4) v1(56.5,51) 56.545,51.045 U4.5 ; v1(59.7,64.6) 59.725,64.575 RST.1 ; C4.1 62.8,55.6 C3.1 64.1,56 v1@64.6,56.5 ; v1(62.3,62) R15.1 ; C13.1 65.1,51.5 ; v1(64.3,60.1) C18.1 ; v1(64.6,56.6) 64.775,56.425 v1(65.15,56.425) ; v1(65.1,51.1) 65.1,51.5 ; v1(65.1,51.9) 65.1,51.5 ; v2(68.175,40.225) 68.5,40.55 GND.0 ; R2.1 68.4,44.525 v1(68.175,44.75) 68.198,44.727 v1(68.753,44.727) ; v1(69.5,46.6) 69.925,46.175 v1(70.05,46.175) 70.975,46.175 C11.1 71.15,46.35 71.15,47.875 71.277,48.002 ; v1(69.925,40.6) 69.95,40.575 v1(69.95,39.825) 69.95,40.025 R8.1 ; v1@72.625,56.825 72.672,56.778 v1(73.204,56.778) 73.204,56.129 C8.1@73.125,56.05 ; C8.1 73.125,54.975 73.225,54.875 C7.1@73.25,54.85 ; v1(74.375,57.875) 74.4,57.85 C5.1 ; C5.1@74.427,56.675 X1.4@75.525,56.675 ; C12.1@76.15,45.6 76.15,44.2 C9.1@76.2,44.15 ; C9.1 76.2,43.475 v1(76.775,42.9) v1(77.35,42.9) ; v1(78.4,58.4) v1(77.4,58.4) 77.778,58.4 77.9,58.522 C22.1 78.4,59.4 78.9,59.9 C20.2 80.325,59.875 U8.3 ; C10.1 78.728,52.528 v1(79.479,52.528) ; v1(78.8,54.7) 78.8,55.202 78.602,55.4 X1.2@77.95,55.4 ; v1(79.125,41) R13.2 ; X1.2@77.95,55.4 77.775,55.225 77.675,55.125 X1.2@77.95,55.4
  Solder Side w0.3: R17.1 67.15,49.05 v1(67.175,49.075) ; MTi.13@75.335,48.45 75.175,48.29 75.175,46.175 75.704,45.646 v1(75.704,45.627)
  Solder Side w0.5: R4.1 64.3,56.9 v1(64.6,56.6) 64.975,56.6 v1(65.15,56.425) ; R10.1 v1(64.3,40) ; v1(65.1,51.1) v1(65.1,51.9) 65.1,52 66.5,53.4 C2.1 ; v1(70.275,42.95) v1(70.85,42.95) MTi.8@72.375,42.95 ; MTi.4@74.065,37.45 74.065,35.935 v1(74.075,35.925) v1(74.725,35.925) ; U3.1 77.7,54 78.2,54.5 v1(78.2,54.6) 78.3,54.7 v1(78.8,54.7) ; v1(81.3,39.575) 81.85,39.575 81.854,39.571 v1(81.854,39.052) 81.854,39.071 81.85,39.075 81.915,39.14 MTi.25@83.375,39.14 ; B1.- v1(81.7,63.4)
GND_RF: Antenna.GND C23.1 L3.1 U3.10 U3.12 U9.7 | length 0.1
  Component Side w0.15: Antenna.GND@66.025,67.45 Antenna.GND@66.1,67.525 ; Antenna.GND@73.9,67.5 Antenna.GND@73.925,67.475
  other v1: 68,57.6 68.8,57.6 69.6,57.6 70.4,57.6 71.2,57.6 66.803,58.403 67.6,58.4 68.4,58.4 69.2,58.4 70,58.4 70.8,58.4 71.6,58.4 72.4,58.4 66.4,59.2 67.2,59.2 68,59.2 68.8,59.2 69.6,59.2 70.4,59.2 71.2,59.2 72,59.2 72.8,59.2 73.6,59.2 66,60 66.8,60 67.6,60 68.4,60 69.2,60 70,60 70.8,60 71.6,60 72.4,60 73.2,60 74,60 73.6,60.8 68.4,61.6 66,64.8 73.2,64.8 74,64.8 72.8,65.6 73.6,65.6
GPS_3V3_CTRL: G_C.0 R16.1 R17.2 U1.17 U5.5 | length 13.2
  Component Side w0.15: G_C.0 v1(69.2,48.4) 69.302,48.502 U1.17
  Solder Side w0.15: U5.5 63.4,51.6 64.9,50.1 67.525,50.1 v1@69.2,48.425 ; R17.2 v1(69.2,48.4)
GPS_EXT_INT: G_INT.0 U1.31 U3.5 | length 13.2
  Component Side w0.15: U1.31 79.652,49.502 80.175,50.025 80.175,50.8 v1(80.225,50.85)
  Solder Side w0.15: U3.5@73.3,53.425 73.3,52.15 74.875,50.575 77.989,50.575 78.589,49.975 79.492,49.975 80.225,50.708 v1(80.225,50.85)
GPS_IN: Antenna.SIG L3.2 U9.3 | length 6.7
  Component Side w0.2: Antenna.SIG@69.925,67.4 70,67.475 Antenna.SIG@70,70.14
  Solder Side w0.2: L3.2@67.1,65.8 67.14,65.84 U9.3 68.11,66.31 69.3,67.5 Antenna.SIG@70,67.5
GPS_TIMEPULSE: G_TPLS.0 U1.32 U3.4 | length 8.8
  Component Side w0.15: U1.32 78.777,50.002 v1(79.275,50.5)
  Solder Side w0.15: G_TPLS.0@74.4,51.825 U3.4@74.4,53.45 ; G_TPLS.0 75.325,50.875 78.9,50.875 v1(79.275,50.5)
I2C1_SCL: R11.1 SCL.0 U1.33 U8.8 | length 19.5
  Component Side w0.15: U1.33 78.102,50.502 78.85,51.25 79.849,51.25 80.8,52.201 80.8,56.375 SCL.0 81.8,57.325 83.925,57.325 84.4,57.8 84.4,62.375 ; U8.8 84.4,62.375 ; R11.1 84.4,63.9 84.4,62.375
I2C1_SDA: R12.1 SDA.0 U1.34 U8.7 | length 17.6
  Component Side w0.15: U1.34 78.178,51.002 78.726,51.55 79.725,51.55 80.475,52.3 80.475,57.025 SDA.0 81.3,57.85 82.25,57.85 82.65,58.25 82.65,61.1 ; U8.7 82.675,61.125 82.65,61.1 ; R12.1 82.65,63.25 82.65,61.1
L1_3V3_CTRL: L13C.0 R18.2 U1.24 U7.5 | length 11
  Component Side w0.15: U7.5 74.825,39.575 75.25,40 L13C.0 76.5,40 R18.2 76.725,41.475 76.725,42.15 75.7,43.175 75.607,43.175 75.175,43.607 75.175,45.356 75.179,45.36 75.179,45.795 75.175,45.798 75.175,46.55 75.35,46.725 U1.24
L1_5V0_CTRL: U1.23
LED: D1.A U1.20 | length 13.7
  Component Side w0.15: U1.20 73.35,44.656 v1(74.979,43.027) ; v1(79,39.05) 79,37.125 79.325,36.8 D1.A@79.875,36.8
  Solder Side w0.15: v1(74.979,43.027) 75.172,43.027 75.936,42.263 79.074,39.124 v1(79,39.05)
MCU_RX_GPS_TX: G_TX.0 U1.22 U3.2 | length 22.4
  Component Side w0.15: U1.22 74.35,45.881 v1(74.654,45.577) ; v1(79.1,46) 79.1,46.549 81.526,48.975 83.177,48.975 v1(83.279,49.077)
  Solder Side w0.15: v1(74.654,45.577) 75.129,45.102 75.921,45.102 76.243,45.424 76.249,45.424 77.025,46.2 v1@78.95,46.2 ; G_TX.0@76.6,51.8 U3.2 ; G_TX.0 76.95,51.475 79.525,51.475 79.775,51.725 80.599,51.725 82.029,50.295 82.604,50.295 82.899,50 ; 82.9,49.999 83.129,49.77 83.129,49.227 v1(83.279,49.077)
MCU_TX_GPS_RX: G_RX.0 U1.21 U3.3 | length 24.1
  Component Side w0.15: U1.21 73.85,45.4 v1(74.575,44.675) ; v1(78.391,45.484) 78.391,46.264 81.68,49.552 v1(82.604,49.552)
  Solder Side w0.15: v1(74.575,44.675) 74.702,44.802 76.051,44.802 76.799,45.55 v1@78.325,45.55 ; G_RX.0@75.475,51.75 G_RX.0@75.487,51.762 ; G_RX.0@75.475,51.775 G_RX.0@75.487,51.762 ; U3.3 75.5,51.775 G_RX.0@75.487,51.762 ; v1@78.35,45.55 v1@78.325,45.55 ; v1(82.604,49.552) 82.161,49.995 81.905,49.995 80.475,51.425 79.9,51.425 79.65,51.175 75.7,51.175 75.5,51.375 G_RX.0 G_RX.0@75.487,51.762 ; v1@78.325,45.55 v1(78.391,45.484) ; v1(78.391,45.484) 78.535,45.484 78.604,45.553 78.532,45.625 v1(78.391,45.484)
NetBOOT_2: BOOT.2 R14.2 | length 6.7
  Component Side w0.15: BOOT.2 60.075,63 R14.2
NetC14_2: C14.2 R3.1 U5.6 | length 2.9
  Solder Side w0.2: C14.2 60.375,54.025 R3.1 62.35,53.3 U5.6
NetC16_2: C16.2 R7.1 U7.6 | length 3.1
  Component Side w0.2: U7.6@74.25,40.5 74.2,40.55 C16.2 74.375,42.275 R7.1
NetC20_1: C20.1 U8.2 | length 1.1
  Component Side w0.3: C20.1 81.375,61.1 U8.2
NetD1_K: D1.K R13.1 | length 1.3
  Component Side w0.3: D1.K@79.825,38.5 79.85,38.525 R13.1
NetL2_1: L2.1 U9.4 | length 1.3
  Solder Side w0.2: U9.4 71.34,65.84 L2.1@71.5,66
NetL2_2: L2.2 U9.5 | length 1.4
  Solder Side w0.2: U9.5@70.3,65.3 71.32,65.3 L2.2
NetQ1_1: Q1.1 R2.2 | length 1.4
  Component Side w0.3: Q1.1 68.275,42.65 R2.2@68.45,42.825
NetR4_2: R4.2 U5.1 | length 1.3
  Solder Side w0.2: U5.1 62.45,56.85 R4.2
NetR8_2: R8.2 U7.1 | length 1.5
  Component Side w0.15: R8.2@70.7,41.2 71.2,41.2 U7.1
NetR9_2: R9.2 WAKE.2 | length 2.4
  Component Side w0.2: WAKE.2@62.175,37.675 62.8,38.3 v1(63.4,38.3)
  Solder Side w0.2: v1(63.4,38.3) R9.2
NRST: C18.2 NRST.0 RST.2 SWD.10 U1.4 | length 34.5
  Component Side w0.15: RST.2@60.85,60.4 61.95,60.4 62.525,60.975 63.05,60.975 63.05,60.175 NRST.0@63.125,60.1 ; NRST.0@63.05,60.1 NRST.0 63.13,60.02 63.13,59.53 63.534,59.125 64.91,59.125 67.312,56.723 71.737,56.723 72.004,56.99 72.314,57.3 72.983,57.3 72.986,57.303 73.421,57.303 73.851,56.873 73.851,55.072 74.295,54.628 74.375,54.708 v1(74.375,54.75) 74.581,54.75 75.35,53.981 U1.4@75.35,52.752
  Solder Side w0.15: v1(74.375,54.75) 77.525,54.75 78.05,55.275 79.575,55.275 81.025,53.825 81.204,53.646 81.204,51.545 82.154,50.595 83.245,50.595 SWD.10
OSC_IN: C6.2 U1.2 X1.3 | length 6.9
  Component Side w0.15: U1.2@76.35,52.752 76.35,55.35 X1.3@77.675,56.675 ; X1.3@77.675,56.675 C6.2@78.527,56.675 ; X1.3@77.675,56.675 C6.2@78.527,56.675 ; C6.2@78.527,56.675 78.8,56.402 C6.2@78.527,56.675
OSC_OUT: C5.2 U1.3 X1.1 | length 4.3
  Component Side w0.15: C5.2@74.4,55.502 X1.1@75.148,55.502 ; U1.3@75.85,52.752 75.85,54.8 X1.1@75.525,55.125 ; X1.1@75.148,55.502 75.425,55.225 X1.1@75.525,55.125 ; X1.1@75.148,55.502 X1.1@75.525,55.125
PSEL0: MTi.14 R5.2 TPS0.0 | length 9.8
  Component Side w0.15: v1(81.225,46.075) 81.3,46.075 81.975,46.75 R5.2
  Solder Side w0.15: MTi.14@76.6,48.525 76.6,47.225 76.95,46.875 79.393,46.875 80.15,46.118 80.15,46.1 81.225,46.1 v1@81.25,46.075 ; TPS0.0 76.605,49.87 MTi.14@76.605,48.45
PSEL1: MTi.15 R6.2 TPS1.0 | length 8.4
  Component Side w0.15: v1(80.529,46.802) 80.529,47.129 81.125,47.725 R6.2@82.85,47.725
  Solder Side w0.15: TPS1.0@77.85,49.875 77.875,49.85 MTi.15@77.875,48.45 ; MTi.15@77.875,48.6 77.875,47.425 78.125,47.175 79.517,47.175 79.89,46.802 v1(80.529,46.802)
RF_IN: U3.11 U9.6 | length 2.6
  Solder Side w0.2: U3.11 70,64 70.3,64.3 ; 70.3,64.3 70.3,64.8 70.3,64.3
SHIELD: J3.5
SPI1_MISO: MISO.0 MTi.10 U1.13 | length 9.6
  Component Side w0.15: v1(70.386,50.497) 70.407,50.475 72.075,50.475 U1.13@72.125,50.525
  Solder Side w0.15: MISO.0 71.9,50.475 70.407,50.475 v1(70.386,50.497) 70.625,50.257 70.625,46.475 71.56,45.54 MTi.10
SPI1_MOSI: MOSI.0 MTi.11 U1.14 | length 7.6
  Component Side w0.15: v1@71.15,49.65 71.15,49.725 71.075,49.8 71.3,50.025 U1.14@72.1,50.025
  Solder Side w0.15: v1@71.15,49.65 70.925,49.65 70.925,49.115 70.925,47.025 71.19,46.76 MTi.11@72.375,46.76 ; v1@71.175,49.675 71.5,50 MOSI.0
  other v1: 71.15,49.825
SPI1_NSS: CS.0 MTi.9 U1.11 | length 14.5
  Component Side w0.15: v1@70.453,51.478 70.453,51.433 70.447,51.428 70.488,51.387 70.491,51.39 70.656,51.555 72.07,51.555 U1.11@72.125,51.5
  Solder Side w0.15: CS.0 71.875,51.575 70.701,51.575 70.528,51.403 v1(70.528,51.353) 70.478,51.353 69.861,50.735 69.861,50.139 70.325,49.675 70.325,47.934 69.516,47.125 69.283,47.125 68.975,46.817 68.975,45.687 70.442,44.22 MTi.9@72.375,44.22 ; MTi.9@72.245,44.35 MTi.9@72.375,44.22 ; MTi.9 MTi.9@72.375,44.22
SPI1_SCK: MTi.12 SCK.0 U1.12 | length 5.9
  Component Side w0.15: v1(71.287,51) U1.12@72.1,51 ; U1.12@72.05,50.95 U1.12@72.1,51 ; U1.12@72.15,51.025 72.125,51 U1.12@72.1,51 ; U1.12@72.15,51.05 U1.12@72.1,51
  Solder Side w0.15: v1(71.287,51) 71.312,51.025 73.3,51.025 74.065,50.26 MTi.12@74.065,48.45
SWCLK: SWD.4 U1.28 | length 13.3
  Component Side w0.15: U1.28 U1.28 79.703,48 81.998,50.295 83.472,50.295 84.47,50.295 84.745,50.57 84.745,54.58 84.32,55.005 SWD.4
SWDIO: SWD.2 U1.25 | length 20
  Component Side w0.15: v1@75.85,46.475 U1.25 ; v1(79.754,45.552) 79.754,46.778 81.426,48.45 v1(82.767,48.45)
  Solder Side w0.15: v1(75.804,46.402) 75.843,46.402 75.895,46.35 76.095,46.55 77.833,46.55 77.837,46.546 79.298,46.546 79.725,46.119 v1@79.725,45.525 ; v1(82.767,48.45) 82.87,48.552 83.497,48.552 84.575,49.631 84.575,56.05 84.35,56.275 SWD.2
SYNC_IN: MTi.16 SI.0 U1.29 | length 7.4
  Component Side w0.15: U1.29 79.777,48.502 81,49.725 v1(81,50.125)
  Solder Side w0.15: MTi.16@79.1,48.475 79.175,48.55 79.175,49.425 79.425,49.675 79.926,49.675 80.279,50.027 80.902,50.027 v1(81,50.125)
SYNC_OUT: MTi.22 SO.0 U1.8 | length 29.8
  Component Side w0.15: v1(69.236,51.995) 69.47,51.995 70.07,52.595 70.202,52.595 71.157,53.55 73.045,53.55 73.35,53.245 U1.8 ; v1(81.825,42.95) 82.475,42.95 SO.0
  Solder Side w0.15: v1(69.236,51.995) 69.425,51.806 69.425,50.124 70.025,49.524 70.025,48.058 69.392,47.425 69.158,47.425 68.675,46.942 68.675,45.563 70.638,43.6 75.204,43.6 75.575,43.229 75.575,43.225 76.475,42.325 81.2,42.325 v1(81.825,42.95) MTi.22@83.375,42.95
TRACESWO: SWD.6 U1.30 | length 11.4
  Component Side w0.15: U1.30 79.752,49.002 80.475,49.725 80.475,50.342 80.783,50.65 81.275,50.65 81.33,50.595 84.32,50.595 84.445,50.72 84.445,53.505 84.215,53.735 SWD.6
UART_RX: MTi.23 XRX.0 | length 2.4
  Component Side w0.15: v1@81.825,41.675 v1(81.8,41.7) XRX.0
  Solder Side w0.15: v1(81.8,41.7) 83.425,41.7 MTi.23@83.45,41.725
UART_TX: MTi.24 XTX.0 | length 2.3
  Component Side w0.15: v1@81.825,40.425 v1(81.8,40.4) 82.475,40.4 XTX.0
  Solder Side w0.15: v1(81.8,40.4) 81.81,40.41 MTi.24@83.375,40.41
USART1_DE: DE.0 U1.16 U4.3 | length 23.9
  Component Side w0.15: U4.3@57.8,57.415 DE.0 ; U4.3 57.89,57.325 57.89,56.861 59.189,55.562 60.487,55.562 62.05,57.125 65.192,57.125 65.9,56.417 65.9,51.302 68.227,48.975 71.573,48.975 71.6,49.002 U1.16
USART1_RX: RX.0 U1.10 U4.1 | length 19.4
  Component Side w0.15: U4.1 60.68,57.725 64.075,57.725 65.441,57.725 66.5,56.666 66.5,51.551 67.176,50.875 69.282,50.875 69.577,51.17 ; 61.1,57.75 RX.0 ; 69.578,51.17 70.061,51.653 ; 70.061,51.654 70.402,51.995 70.451,51.995 70.458,52.002 U1.10
USART1_TX: TX.0 U1.9 U4.4 | length 26.1
  Component Side w0.15: TX.0 56.52,59 ; U4.4 56.545,59.245 56.875,59.575 62.1,59.575 63.65,58.025 65.565,58.025 66.8,56.79 66.8,51.675 67.297,51.178 69.161,51.178 69.453,51.47 ; 69.454,51.47 69.761,51.777 ; 69.761,51.778 70.278,52.295 70.327,52.295 70.784,52.752 U1.9
VCC_RF: C23.2 U3.14 U9.1 | length 13.8
  Solder Side w0.2: U9.1 67.3,63.95 C23.2 C23.2@67.3,63.8 ; U3.14@73.3,62.9 U3.14 73.3,61.8 72.2,60.7 66.8,60.7 66.2,61.3 66.2,63.5 66.6,63.9 C23.2@67.2,63.9 ; C23.2@67.2,63.9 C23.2@67.3,63.8 ; C23.2@67.2,63.9 C23.2@67.3,63.8
VIN: J3.2 Q1.3 Vin.0 | length 9.3
  Component Side w0.5: J3.2@60.9,40.5 61,40.4 J3.2@61,40.2 ; Vin.0 64.5,43.4 Q1.3
  Component Side w1: J3.2 60.95,42.85 61.7,43.6 Q1.3
WKUP: C17.2 R9.1 R10.2 U1.7 WKUP.0 | length 24.9
  Component Side w0.15: v1(68.435,51.703) 68.575,51.842 68.575,52.076 69.394,52.895 70.078,52.895 71.033,53.85 73.17,53.85 73.85,53.17 U1.7
  Solder Side w0.15: WKUP.0@65.5,36.425 65.525,36.45 C17.2@65.525,37.25 ; C17.2@65.55,37.225 C17.2@65.525,37.25 ; v1(68.435,51.703) 69.125,51.013 69.125,50 69.725,49.4 69.725,48.183 69.267,47.725 69.034,47.725 67.4,46.091 67.4,41.2 65.525,39.325 C17.2@65.525,37.25
XRST: MTi.6 R1.1 XRST.0 | length 5.7
  Component Side w0.15: v1(73.029,38.202) 73.048,38.202 73.075,38.175 73.075,37.35 XRST.0
  Solder Side w0.15: MTi.6@72.4,40.425 73.6,40.425 73.85,40.175 73.85,39 73.052,38.202 v1(73.029,38.202)
pads on no net: F1.1 F2.1 F3.1 F4.1 MTi.1 MTi.2 MTi.3 MTi.17 MTi.18 MTi.19 MTi.20 MTi.26 MTi.27 MTi.28 SWD.7 SWD.8 U1.37 U1.ThermalPaste U3.9 U3.15 U3.16 U3.17 U3.18 U8.5 U8.6 U9.PASTE WAKE.SHIELD

## Polygon pours and split planes (outlines as drawn)
GND_RF on Solder Side "GND_RF_L04_P002" (solid, pour order 2): 67.55,56.45 71.95,56.45 75,59.5 75,66.5 76.5,66.5 76.5,69.5 72.3,69.5 72.3,64 70.5,64 70.5,63 69.5,63 69.5,64 69.5,66 67.7,66 67.7,69.5 63.5,69.5 63.5,66 65,66 65,59
GND_RF on Component Side "GND_RF_L01_P004" (solid, pour order 4): 67.5,56.5 72,56.5 75,59.5 75,64 75,66.5 76.5,66.5 76.5,69.5 72.3,69.5 72.3,64 67.7,64 67.7,69.5 63.5,69.5 63.5,66 65,66 65,59
GND on GND "GND_L02_P006" (solid, remove dead copper, pour order 6): 63,35.5 63,37 57,37 57,35.5 56,35.5 55.5,36 55.5,69 56,69.5 63.5,69.5 63.5,66 65,66 65,59 67.5,56.5 72,56.5 75,59.5 75,64 75,66.5 76.5,66.5 76.5,69.5 84,69.5 84.5,69 84.5,36 84,35.5
3V3 on +3.3 "3V3_L03_P010" (solid, remove dead copper, pour order 10): 55.5,69 56,69.5 63.5,69.5 63.5,66 65,66 65,59 67.5,56.5 72,56.5 75,59.5 75,66.5 76.5,66.5 76.5,69.5 84,69.5 84.5,69 84.5,36 84,35.5 63,35.5 63,37 57,37 57,35.5 56,35.5 55.5,36 55.5,69

## Keep-outs
Keep-Out Layer:
  pour cut-out: 64,68.4 76,68.4 76,70 64,70

## Silkscreen, mask and mechanical layers (free items; w line width, h text height)
Top Overlay:
  circle w0.15: c82.575,56.275 r0.673
  text "Shield" at 57.6,45.3 h0.8 r90
  text "A/Y" at 58.7,45.3 h0.8 r90
  text "B/Z" at 60,45.3 h0.8 r90
  text "Vin" at 61.3,45.3 h0.8 r90
  text "GND" at 62.6,45.2 h0.8 r90
Bottom Overlay:
  rectangle: 55.75,41.75 63.5,50.8
  lines w0.1: 68.7,48.9 68.7,52.1 ; 68.7,51 71,51 ; 69,48.8 72.7,48.8 73.9,50 73.9,51.2 ; 73.6,51.5 73.9,51.2 ; 76.5,50.4 78.2,50.4 78.5,50.1 82.1,50.1 ; 77.3,51.5 77,51.2 73.9,51.2 ; 82.1,49.8 82.1,50.5 ; 71,51 71,50.5 71.6,49.9 72.2,49.9 72.6,49.5 73.1,49.5 73.5,49.9 73.5,51.2 73.2,51.5 72.8,51.5 72.3,52 71.5,52 71,51.5 71,51 ; 73.9,51.2 73.9,51.2
  text "naniBox.com" at 55.55,57.575 h0.8 r270
  text ".Print_Date" at 56.737,57.575 h0.8 r270
  text "SixAx v1.0b" at 57.925,57.575 h0.8 r270
  text "+" at 81.25,55.925 h0.8
  text "-" at 81.25,54.6 h0.8
  text "Vin" at 60.6,37.3 h0.8 r270
  text "A/Y" at 58.1,37.275 h0.8 r270
  text "B/Z" at 59.275,37.275 h0.8 r270
  text "Gnd" at 61.825,37.2 h0.8 r270
  text "Shld" at 56.825,36.75 h0.8 r270
Mechanical 1:
  lines w0.1: 56.1,35 56,35 55,36 55,69 56,70 62.3,70 64,70 64,68.4 76,68.4 76,70 77.7,70 84,70 85,69 85,36 84,35 63.7,35
Mechanical 28:
  circle w0.15: c70,68.8 r6.701
  lines w0.01: 40.5,35 90,35 90,60 ; 50,35 50,60 ; 55,35 55,57.5 ; 60,35 60,60 ; 65,35 65,57.5 ; 70,40 92.5,40 ; 70,45 95,45 ; 70,50 92.5,50 ; 70,55 95,55 ; 70,65 95,65 ; 70,70 92.5,70 ; 70,75 95,75 ; 70,84.5 70,35 ; 75,35 75,57.5 ; 80,35 80,60 ; 85,35 85,57.5 ; 92.5,60 70,60 70,35 ; 95,35 70,35
  lines w0.1: 57,62.5 58,62.5 ; 57.5,62 57.5,63 ; 60.3,62.5 61.3,62.5 ; 60.8,62 60.8,63 ; 55.5,39.3 55.5,45.1 63.9,45.1 63.9,39.3 55.5,39.3 ; 64.5,31 64.5,35 64.5,39.5 67,42 67,44.5 69.5,47 70.5,47 73,44.5 73,42 75.5,39.5 75.5,35 75.5,31 75,30.5 65,30.5 64.5,31
  lines w0.15: 90.05,46.85 91.05,46.85 ; 90.55,46.35 90.55,47.35 ; 55,36 56,35 57.3,35 57.3,36.6 57.4,36.7 62.4,36.7 62.5,36.6 62.5,35 84,35 85,36 85,69 84,70 56,70 55,69 55,36
  text "40mm" at 95,75 h0.8
  text "20mm" at 50,60 h0.8 r90
  text "10mm" at 60,60 h0.8 r90
  text "10mm" at 80,60 h0.8 r90
  text "20mm" at 90,60 h0.8 r90
  text "30mm" at 76.509,59.7 h0.8
  text "0mm" at 74.809,59.05 h0.8 r90
  text "20mm" at 76.509,49.7 h0.8
  text "10mm" at 95,45 h0.8
  text "0mm" at 95,35 h0.8

## Dimensions
55,36 to 83,68 on Mechanical 16
55,36 to 57,68 on Mechanical 16
56,35 to 57,68 on Mechanical 16
56,35 to 56,70 on Mechanical 16
55,36 to 85,36 on Mechanical 16

## Text inside footprints (layer, text, board x,y; h text height)
U3: Bottom Overlay "RF" at 71.8,60.1 h0.8 r90; Top Overlay "RF" at 71.8,58.6 h0.8 r90